# Altium PCB PCBdo_an2.PcbDoc
Units mil, origin at the board's own origin, x right, y up, seen from the top; angles counter-clockwise.
Board outline 3549.72 x 2579.72 mil, 2 copper layers (Top Layer, Bottom Layer); 32 components, 40 nets, 161 pads, 0 vias.
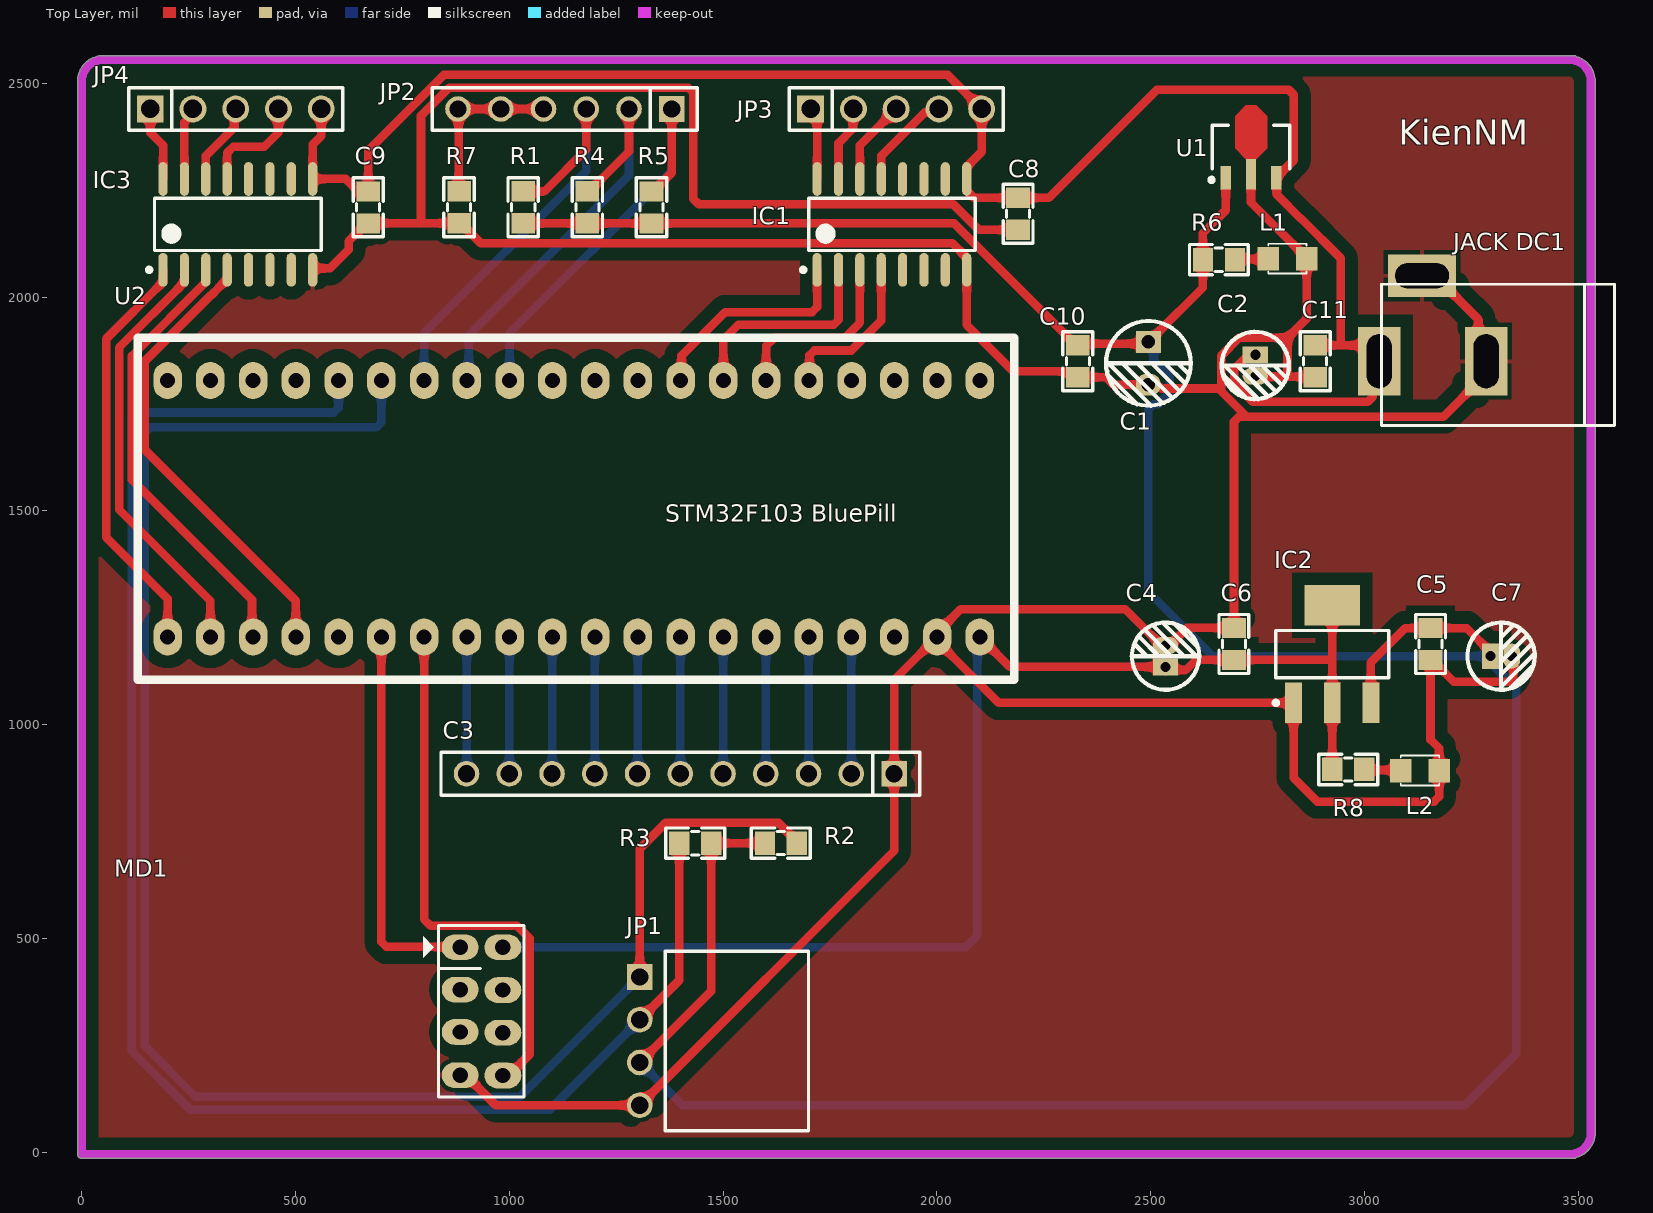
[diagram p0: Top Layer view]
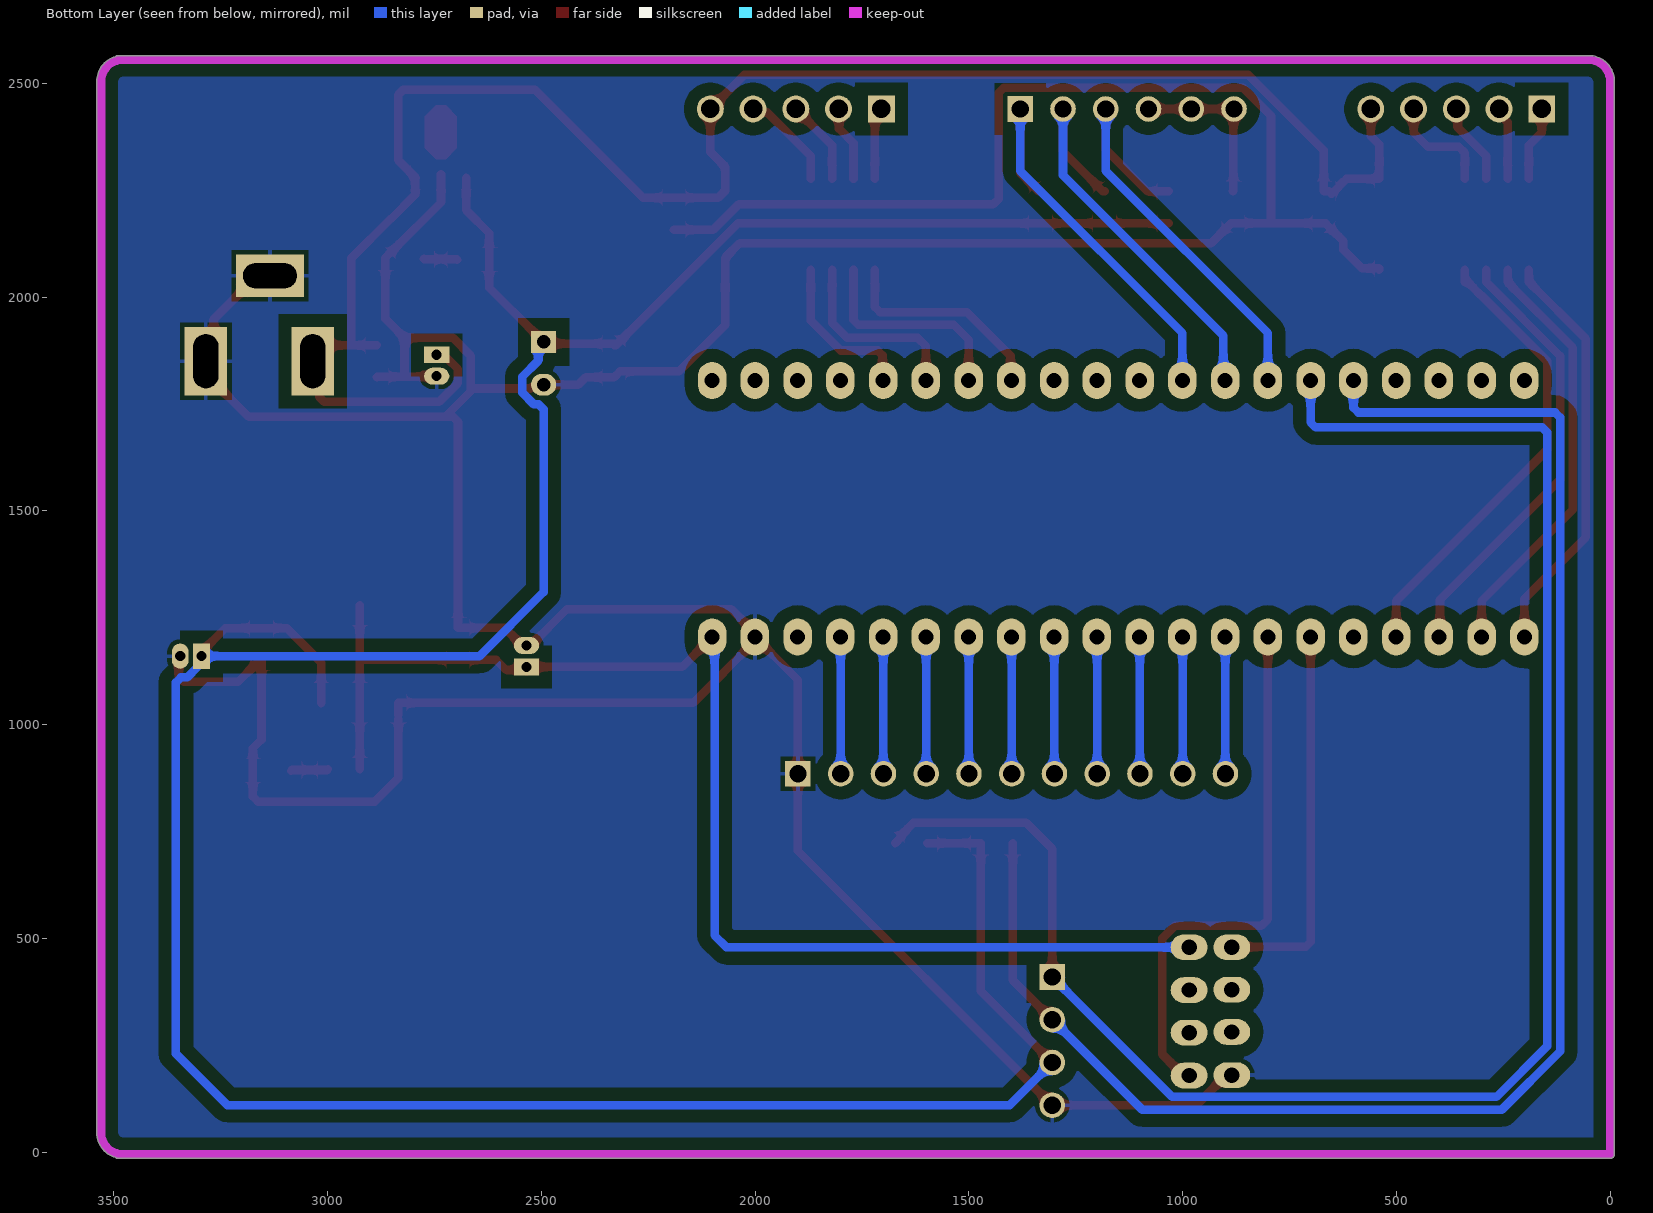
[diagram p1: Bottom Layer view, seen from below]
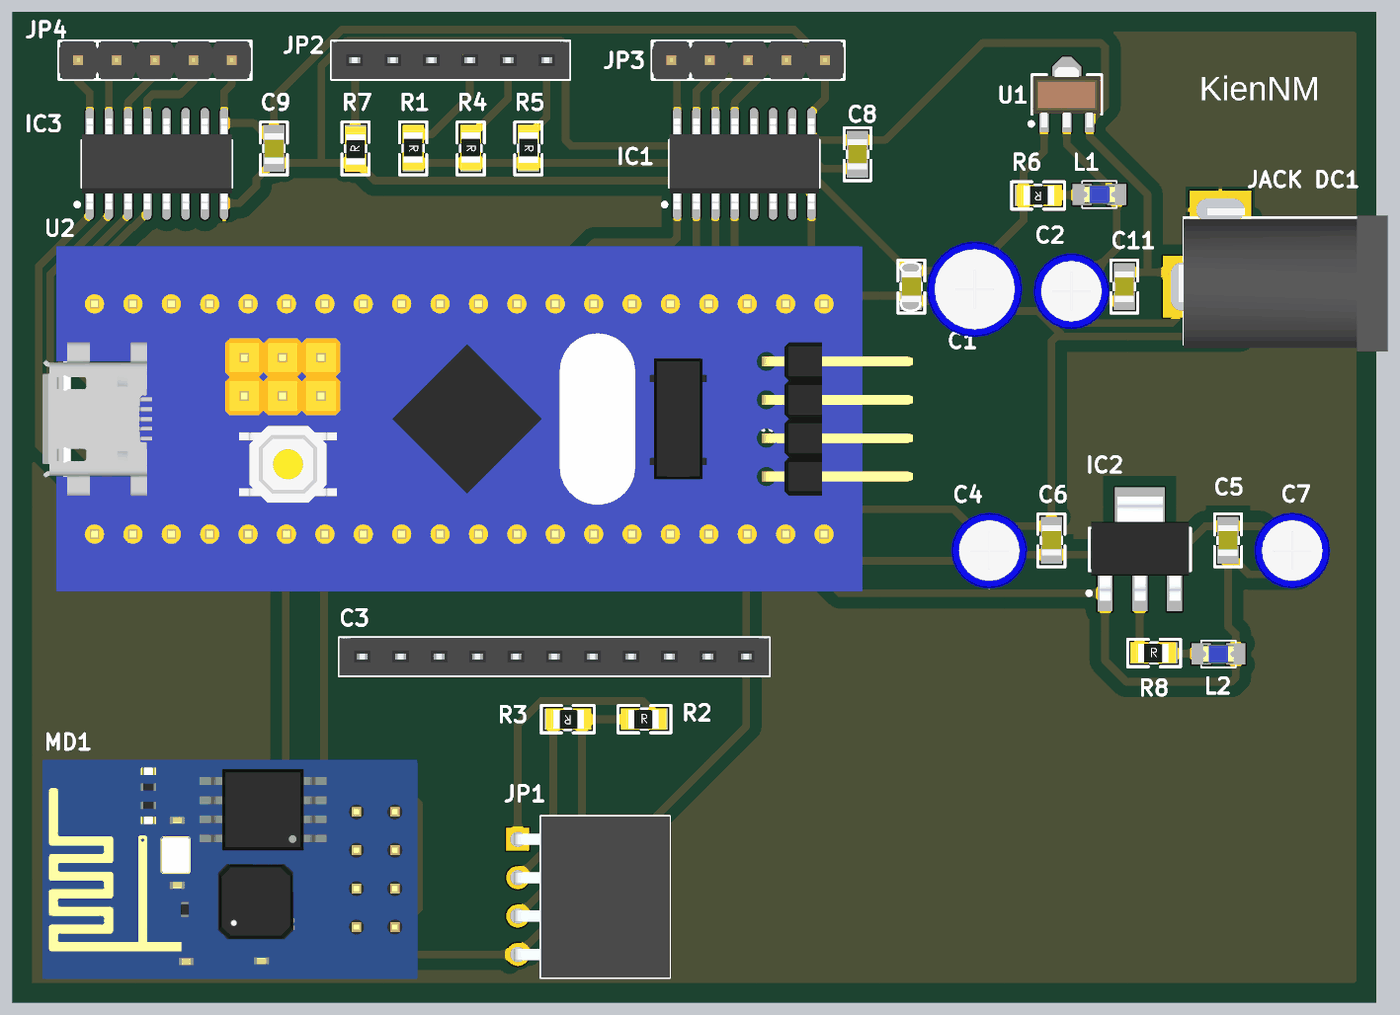
[diagram p2: 3D render of the assembled board from above, using the file's embedded part models]

## Layer stack, top to bottom
Top Solder: solder mask 0.4, Solder Resist, Dk 3.5
Top Layer: signal copper 1.4
Dielectric 1: dielectric 12.6, FR-4, Dk 4.8
Bottom Layer: signal copper 1.4
Bottom Solder: solder mask 0.4, Solder Resist, Dk 3.5

## Board outline
-9.86,-5 -9.86,2510 -9.27,2513.34 cw(c50,2505) 50,2564.86 50.08,2564.86 3480,2564.86 3490,2564.86 cw(c3490,2555) 3496.27,2562.6 cw(c3480,2505) 3539.27,2513.34 3539.86,2510 3539.86,2504.96 3539.86,45 cw(c3480,45) 3496.27,-12.6 cw(c3490,-5) 3490,-14.86 0,-14.86 cw(c0,-5)

## Design rules (kind name [scope] priority, off if disabled: settings)
Clearance [All] p1: gap=30 ignorepadtopadclearanceinfootprint=FALSE
PolygonConnect [All] p1: connectstyle=Relief reliefconductorwidth=10 reliefentries=4 polygonreliefangle="90 Angle" airgapwidth=10
RoutingVias [All] p1: holewidth=28 width=50 viastyle="Through Hole" minholewidth=28 minwidth=50 maxholewidth=28 maxwidth=50
SilkToSilkClearance [IsText] p1: silktosilkclearance=10
SolderMaskExpansion [All] p1: expansion=4 istentingtop=FALSE
Width [All] p1: maxlimit=40 minlimit=10 preferedwidth=25
29 further rules are at their usual default settings.

## Components (designator, comment, footprint, x,y, rotation, side; value= is the part's Value field where it differs from the comment)
C1 "1uF" "tu hoa 5mm" 2495,1845 r270 top
C2 "10uF" "tu hoa 4mm" 2745,1840 r270 top
C3 "JP11" JP11-C1T 1900,885 r180 top
C4 "10uF" "tu hoa 4mm" 2535,1160 r90 top
C5 "104" "tu 0805" 3155,1188.49 r270 top
C6 "104" "tu 0805" 2695,1188.49 r90 top
C7 "10uF" "tu hoa 4mm" 3320,1160 r0 top
C8 "33nF" "tu 0805" 2190,2195 r270 top
C9 "33nF" "tu 0805" 670,2210 r270 top
C10 "104" "tu 0805" 2330,1850 r270 top
C11 "104" "tu 0805" 2885,1850 r270 top
IC1 "ULN2003" "SOP 16" 1895,2170 r90 top
IC2 "LM1117" SOT223-4N 2925,1165 r90 top value=LM317
IC3 "ULN2003" "SOP 16" 365,2170 r90 top
"JACK DC1" "JACK DC 5.5" "JACK DC 5.5" 3160,1950 r180 top value="Jac DC"
JP1 "JP 1x4 2.54" "JP 1x4 CC" 1305,259.51 r270 top
JP2 "JP 1x6 2.54" "JP 1x6 CT" 1380,2440 r180 top
JP3 "JP 1x5 2.54" "JP 1x5 DT" 1705,2440 r0 top
JP4 "JP 1x5 2.54" "JP 1x5 DT" 160,2440 r0 top
L1 "LED 0805" LED-0805-Blue 2775,2090 r0 top
L2 "LED 0805" LED-0805-Blue 3085,892.46 r0 top
MD1 "ESP8266 Module" "ESP2866 Module" 885,479 r270 top
R1 "10k" "tro smd 0805" 1035,2210.1 r270 top
R2 "1k" "tro smd 0805" 1635,725 r0 top
R3 "1k" "tro smd 0805" 1435,720 r180 top
R4 "10k" "tro smd 0805" 1185,2210.1 r270 top
R5 "10k" "tro smd 0805" 1335,2210 r270 top
R6 "1k" "tro smd 0805" 2660,2085 r180 top
R7 "0R" "tro smd 0805" 880,2210.1 r90 top
R8 "180R" "tro smd 0805" 2962.23,897.39 r0 top
U1 "78L05 SMD SOT89" SOT89 2735,2350 r90 top
U2 "STM32 BluePill" "STM32 Bluepill" 1050.69,1525 r90 top

## Footprints (in the part's own frame and the unit in brackets; to place one, negate y for a bottom-side part, rotate by r counter-clockwise, add the part's x,y. Pads: shape width x height; smd on the part's side, far side on the other; paste and mask are expansions set on the pad)
"ESP2866 Module" [mil]
  oval 60x86 hole 36: 1(0,0) 2(99,0) 3(198,0) 4(299,0) 5(0,100) 6(100,100) 7(199.5,100) 8(300,100)
  silkscreen extent -51,-86 350,149, body extent -137,-817 433,159, height 381
"JACK DC 5.5" [mil] "Jac DC input"
  rect 100x160 hole 59.06 slot 125.98 at 90 deg: 1(125,100) 2(-125,100)
  rect 160x100 hole 59.06 slot 125.98 at 0 deg: 3(25,-100)
  silkscreen extent -425,-80 120,250, body extent -410,-105 134,269, height 434
JP11-C1T [mm] "11 row, straight, gold plating"
  rect 1.52x1.52 hole 1.02: 1(0,0)
  round 1.52 hole 1.02: 2(2.54,0) 3(5.08,0) 4(7.62,0) 5(10.16,0) 6(12.7,0) 7(15.24,0) 8(17.78,0) 9(20.32,0) 10(22.86,0) 11(25.4,0)
  silkscreen extent -1.52,-1.27 26.92,1.27, body extent -1.52,-1.27 26.92,1.23, height 8.51
"JP 1x4 CC" [mm]
  rect 1.52x1.52 hole 1.02: 1(-3.81,0)
  round 1.52 hole 1.02: 2(-1.27,0) 3(1.27,0) 4(3.81,0)
  silkscreen extent -5.33,1.52 5.33,10.03, body extent -5.33,-0.25 5.33,10.05, height 2.51
"JP 1x5 DT" [mm] "5 pins, 1 row, straight, gold plating"
  rect 1.6x1.6 hole 1.1: 1(0,0)
  round 1.6 hole 1.1: 2(2.54,0) 3(5.08,0) 4(7.62,0) 5(10.16,0)
  silkscreen extent -1.27,-1.27 11.43,1.27, body extent -1.27,-1.27 11.43,1.27, height 8.54
"JP 1x6 CT" [mm] "6 row, straight, gold plating"
  rect 1.52x1.52 hole 1.02: 1(0,0)
  round 1.52 hole 1.02: 2(2.54,0) 3(5.08,0) 4(7.62,0) 5(10.16,0) 6(12.7,0)
  silkscreen extent -1.52,-1.27 14.22,1.27, body extent -1.52,-1.25 14.22,1.25, height 8.51
LED-0805-Blue [mil]
  rect 50x55 smd: 1(0,0) 2(90,0)
  silkscreen extent 0,-35 90,35, body extent 5,-25 85,25, height 43
"SOP 16" [mm] "SOIC, 16-Leads, Body 9.90x3.91mm, Pitch 1.27mm, IPC Medium Density"
  oval 2x0.55 smd: 1(-2.7,4.445) 2(-2.7,3.175) 3(-2.7,1.905) 4(-2.7,0.635) 5(-2.7,-0.635) 6(-2.7,-1.905) 7(-2.7,-3.175) 8(-2.7,-4.445) 9(2.7,-4.445) 10(2.7,-3.175) 11(2.7,-1.905) 12(2.7,-0.635) 13(2.7,0.635) 14(2.7,1.905) 15(2.7,3.175) 16(2.7,4.445)
  silkscreen extent -2.82,-4.95 1.55,5.39, body extent -3,-4.95 3,4.95, height 1.4
SOT89 [mm] "SOT89, 3-Leads, Body 4.55x2.55mm, Pitch 1.50mm, Lead Span 4.1mm, IPC Medium Density"
  rect 1.4x0.6 smd: 1(-1.8,1.5) 3(-1.8,-1.5)
  rect 1.8x0.6 smd: 2(-1.6,0)
  Top Layer region: -0.7,0.3 -0.05,0.95 1.85,0.95 2.5,0.3 2.5,-0.3 1.85,-0.95 -0.05,-0.95 -0.7,-0.3
  silkscreen extent -2.05,-2.3 1.32,2.47, body extent -2.16,-2.25 1.84,2.25, height 1.5
SOT223-4N [mm] "SOT223, 4-Leads, Body 6.5x3.5mm, Pitch 2.3mm, Lead Span 7mm, IPC Medium Density"
  rect 2.4x1 smd: 1(-2.9,2.3) 2(-2.9,0) 3(-2.9,-2.3)
  rect 2.4x3.3 smd: 4(2.9,0)
  silkscreen extent -3.02,-3.35 1.4,3.47, body extent -3.39,-3.27 3.5,3.23, height 1.72
"STM32 Bluepill" [mm] "STM32 Bluepill"
  oval 2.2x1.7 hole 0.9: 1(-8.128,21.59) 2(-8.128,19.05) 3(-8.128,16.51) 4(-8.128,13.97) 5(-8.128,11.43) 6(-8.128,8.89) 7(-8.128,6.35) 8(-8.128,3.81) 9(-8.128,1.27) 10(-8.128,-1.27) 11(-8.128,-3.81) 12(-8.128,-6.35) 13(-8.128,-8.89) 14(-8.128,-11.43) 15(-8.128,-13.97) 16(-8.128,-16.51) 17(-8.128,-19.05) 18(-8.128,-21.59) 19(-8.128,-24.13) 20(-8.128,-26.67) 21(7.112,-26.67) 22(7.112,-24.13) 23(7.112,-21.59) 24(7.112,-19.05) 25(7.112,-16.51) 26(7.112,-13.97) 27(7.112,-11.43) 28(7.112,-8.89) 29(7.112,-6.35) 30(7.112,-3.81) 31(7.112,-1.27) 32(7.112,1.27) 33(7.112,3.81) 34(7.112,6.35) 35(7.112,8.89) 36(7.112,11.43) 37(7.112,13.97) 38(7.112,16.51) 39(7.112,19.05) 40(7.112,21.59)
  silkscreen extent -10.67,-28.7 9.65,23.37, body extent -11.94,-32.59 10.92,24.97, height 19.77
"tro smd 0805" [mm]
  rect 1.2x1.4 smd: 1(-0.946,-0.061) 2(0.954,-0.061)
  silkscreen extent -1.75,-0.97 1.75,0.84, body extent -1.56,-0.76 1.44,0.64, height 0.53
"tu 0805" [mm] "Compoment SMD 80x50mil"
  rect 1.2x1.4 smd: 1(-0.946,-0.003) 2(0.954,-0.003)
  silkscreen extent -1.75,-0.89 1.75,0.89, body extent -1.01,-0.64 1.01,0.63, height 0.61
"tu hoa 4mm" [mm]
  rect 1x1.5 hole 0.6: 1(-0.635,0)
  oval 1x1.5 hole 0.6: 2(0.635,0)
  silkscreen extent -2,-2 2.01,2.01, body extent -2.47,-2.47 2.58,2.58, height 14.81
"tu hoa 5mm" [mm]
  rect 1.3x1.5 hole 0.8: 1(-1.27,0)
  oval 1.3x1.5 hole 0.8: 2(1.27,0)
  silkscreen extent -2.51,-2.51 2.51,2.51, body extent -3.12,-3.18 3.23,3.18, height 14.55

## Part data
C1: library part "Tu Hoa 1uF 50V 5x11", "Cắm", Chung_Loai=Cắm, Don_Vi=Con, Ma_Hang=MH001355, So_Chan=2, Ten_Linh_Kien="Tụ Hóa 1uF 50V 5x11MM"
C2 C4 C7: library part "Tu Hoa 10uF 16V 4x7", "Cắm", Chung_Loai=Cắm, Don_Vi=Con, Ma_Hang=MH006855, So_Chan=2, Ten_Linh_Kien="Tụ Hóa 10uF 16V"
C3: "WR-PHD 2.54 mm Angled Socket Header", Manufacturer="W¨¹rth Elektronik eiSos GmbH", partNo=613011143121, ComponentLink1 Description=Manufacturer, ComponentLink1URL=http://www.we-online.com, ComponentLink2 Description=Datasheet, ComponentLink2URL=http://katalog.we-online.de/em/datasheet/6130xx143121.pdf, Created by="Karrer Zheng", Created Date="29 March 2013", NoPins=11
C5 C6 C10 C11: library part "Tu 0805 104 50V 10%", "Dán", Chung_Loai=Dán, Don_Vi=Con, Ma_Hang=MH004551, So_Chan=2, Ten_Linh_Kien="Tụ 0805 104-100nF 10% 50V"
C8 C9: library part "Tu 0805 33nF 50V 20%", "Dán", Chung_Loai=Dán, Don_Vi=Con, Ma_Hang=MH007854, So_Chan=2, Ten_Linh_Kien="Tụ 0805 33nF 50V 20%"
IC1 IC3: library part "ULN2003A SMD", "Dán", Chung_Loai=Dán, Don_Vi=Con, Ma_Hang=MH002408, Ten_Linh_Kien="ULN2003 SOP16"
IC2: "3v3"
JP1: library part "JP 1x4 2.54 Cai Cong", "Cắm", Chung_Loai=Cắm, Don_Vi=Con, Ma_Hang=MH001265, Ten_Linh_Kien="Jump Đơn Cái 2.54MM 1x40P Cong"
JP2: library part "JP 1x6 2.54 Cai Thang", "Cắm", Chung_Loai=Cắm, Don_Vi=Con, Ma_Hang=MH004006, Ten_Linh_Kien="Jump Đơn Cái 2.54MM 1x20P Thẳng"
JP3 JP4: library part "JP 1x5 2.54 Duc Thang", "Cắm", Chung_Loai=Cắm, Don_Vi=Con, Ma_Hang=MH000903, Ten_Linh_Kien="Jump Đơn Đực 2.54MM 1x40P Thẳng 11MM"
L1 L2: library part "LED 0805 Xanh Duong", "Dán", Chung_Loai=Dán, Don_Vi=Con, Ma_Hang=MH002327, Ten_Linh_Kien="LED 0805 Màu Xanh Dương (Blue)"
R1 R4 R5: library part "Tro 0805 5% 10k", "Dán", Chung_Loai=Dán, Don_Vi=Con, Ma_Hang=MH005239, So_Chan=2, Ten_Linh_Kien="Trở 0805 5% 10k"
R2 R3: library part "Tro 0805 1% 1k", "Dán", Chung_Loai=Dán, Don_Vi=Con, Ma_Hang=MH005468, So_Chan=2, Ten_Linh_Kien="Trở 0805 1% 1k"
R6: library part "Tro 0805 5% 1k", "Dán", Chung_Loai=Dán, Don_Vi=Con, Ma_Hang=MH005234, So_Chan=2, Ten_Linh_Kien="Trở 0805 5% 1k"
R7: library part "Tro 0805 5% 0R", "Dán", Chung_Loai=Dán, Don_Vi=Con, Ma_Hang=MH005230, So_Chan=2, Ten_Linh_Kien="Trở 0805 5% 0R"
R8: library part "Tro 0805 5% 180R", "Dán", Chung_Loai=Dán, Don_Vi=Con, Ma_Hang=MH005256, So_Chan=2, Ten_Linh_Kien="Trở 0805 5% 180R"
U1: "Dán", Chung_Loai=Dán, Don_Vi=Con, Ma_Hang=MH004845, Ten_Linh_Kien="78L05 SOT89 0.1A 5V"
U2: "STM32F103C8T6 breakout board"

## Nets (pads, with @x,y where several pads share a name; then routed paths per layer and width w, separated by ;. In a path a pad name is that pad's centre, name@x,y a point inside that pad or via, vN(x,y) a via of type N, cw(c..) or ccw(c..) an arc to the next point about the centre after c; other vN are vias at no path point)
3v3: C4.1 C6.1 IC2.2 IC2.4 MD1.5 R8.1 U2.20 | length 3080.9
  Top Layer w20: U2.20 2170.69,1135 C4.1 C4.1@2535,1125 ; C4.1@2535,1125.31 2537.5,1127.81 2582.81,1127.81 2606.26,1151.26 C6.1 2923.74,1151.26 2925,1150 ; R8.1 IC2.2 IC2.4
  Bottom Layer w20: MD1.5 2067.28,479 2095,506.72 2095,1199.31 U2.20
5v: C1.1 C5.1 C7.1 C10.1 IC2.3 JP1.3 R1.2 R2.1 R3.1 R4.2 R5.2 R6.2 U1.1 | length 7792.1
  Top Layer w20: R1.2@1032.61,2172.43 R5.2 2040.73,2172.43 2325.93,1887.23 C10.1 ; JP1.3 1472.23,376.74 R3.1 ; R3.1@1472.23,722.5 R2.1@1597.67,722.5 ; C10.1@2329.87,1891.11 2491.11,1891.11 C1.1 2498.94,1895 2514.53,1910.59 2514.53,1914.53 2622.43,2022.43 R6.2 2622.43,2149.69 2675.94,2203.21 U1.1 ; IC2.3 3015,1050.28 3015,1145 3095.72,1225.72 C5.1 3239.12,1225.72 3295,1169.84 C7.1
  Bottom Layer w20: JP1.3 1404.51,110 3235,110 3355,230 3355,1098.76 3343.28,1110.47 3328.56,1110.47 3304.69,1134.35 3304.69,1150.31 C7.1 2645,1160 2495,1310 2495,1737.69 2506.72,1749.41 2517.82,1749.41 2544.53,1776.12 2544.53,1813.88 2507.29,1851.13 2507.29,1882.71 C1.1
12v: "JACK DC1.1" C2.1 C8.1 C9.1 C11.1 IC1.9 IC3.9 JP3.5 JP4.5 U1.3 | length 4424
  Top Layer w20: JP4.5 560,2376.99 540,2356.99 IC3.9 616.86,2276.3 651.91,2241.24 657.9,2247.23 C9.1 669.87,2342.89 846.9,2519.92 2025.08,2519.92 JP3.5 2105,2339.84 2070,2304.84 IC1.9 2070,2248.2 2085.98,2232.23 C8.1 2262.23,2232.23 2515,2485 2823.28,2485 2835,2473.28 2835,2320.08 U1.3 2795,2278.19 2795,2240 2852.11,2182.89 2852.89,2182.89 2945,2090.78 2945,1890 2942.23,1887.23 ; C2.1 2735.31,1855.31 2719.35,1855.31 2695.47,1831.44 2695.47,1798.56 2739.03,1755 3008.28,1755 3020,1766.72 3020,1845 3030,1855 ; C11.1 2942.23,1887.23 ; 3035,1850 3030,1855 ; 2942.23,1887.23 2997.77,1887.23 3030,1855
  Bottom Layer w20: JP3.5@2105,2428.37 JP3.5
ADC1: JP2.3 R1.1 U2.34 | length 1092.8
  Top Layer w20: U2.34@785,1800 790,1805 U2.34 ; R1.1@1032.61,2247.23 1082.23,2247.23 1180,2345 JP2.3
  Bottom Layer w20: U2.34 800.69,1915.69 1180,2295 JP2.3
ADC2: JP2.2 R4.1 U2.33 | length 1027.5
  Top Layer w20: R4.1@1182.61,2247.23 1186.54,2247.23 1280,2340.68 JP2.2
  Bottom Layer w20: U2.33 905,1809.31 905,1910 1280,2285 JP2.2
ADC3: JP2.1 R5.1 U2.32 | length 1006.8
  Top Layer w20: R5.1 1336.54,2247.23 1380,2290.68 JP2.1
  Bottom Layer w20: U2.32 1000.69,1915.69 1380,2295 JP2.1
GND: "JACK DC1.2" "JACK DC1.3" C1.2 C2.2 C3.1 C4.2 C5.2 C6.2 C7.2 C8.2 C9.2 C10.2 C11.2 IC1.8 IC2.1 IC3.8 JP1.4 L1.2 L2.2 MD1.4 R7.1 U1.2 U2.19 | length 11524.2
  Top Layer w20: IC3.8 540,2066.56 540.76,2067.32 580.83,2067.32 624.02,2110.52 624.02,2130.52 665.93,2172.43 C9.2 670.09,2172.65 792.65,2172.65 ; MD1.4 898,180 968.49,109.51 JP1.4 1900,704.51 C3.1 1900,1104.31 U2.19 2000.69,1214.84 2055.84,1270 2440.16,1270 2525.16,1185 C4.2 2544.84,1185 2585.91,1226.07 C6.2 2695.13,1708.42 2706.85,1720.13 3185.13,1720.13 3285,1820 3285,1850 3296.72,1861.72 3266.72,1891.72 3266.72,1948.28 3165,2050 3135,2050 ; U2.19@2000.69,1195.16 2145.02,1050.83 IC2.1 IC2.1@2834.45,1023.27 ; C8.2 2098.16,2157.43 2038.65,2216.93 1443.07,2216.93 1429.92,2230.08 1429.92,2478.21 1418.21,2489.92 859.32,2489.92 793.37,2423.97 793.37,2173.37 792.65,2172.65 ; 2665.47,1786.14 2665.47,1862.97 2707.19,1904.69 2820.29,1904.69 ; 2720,1725 2658.86,1786.14 2526.24,1786.14 2523.35,1789.03 2500.97,1789.03 C1.2 2413.94,1795 2396.52,1812.43 C10.2 2316.24,1826.05 2178.95,1826.05 2070,1935 IC1.8 2070,2092.24 2036.34,2125.91 933.3,2125.91 886.33,2172.87 R7.1 882.17,2172.65 792.65,2172.65 ; U1.2 2735,2221.57 2849.07,2107.5 2850,2107.5 2865,2092.5 L1.2 2865,1949.4 2820.29,1904.69 ; C2.2 2754.84,1815 2756.13,1813.71 2819.85,1813.71 ; C2.2@2748.71,1818.71 2776.2,1818.71 ; IC2.1@2834.45,1013.58 2834.45,875.55 2890,820 3163.28,820 3175,831.72 L2.2 3175,945 3154.87,965.13 C5.2 3158.8,1150.92 3209.8,1099.92 3336.99,1099.92 3348.71,1111.63 3348.71,1156.29 C7.2 ; C11.2 2883.58,1813.71 2819.85,1813.71 ; 2819.85,1813.71 2820.29,1814.14 2820.29,1904.69
  Bottom Layer w20: U2.19@2000,1204.31 U2.19 U2.19@2000.69,1195.16
NetC3_2: C3.2 U2.17 | length 320.3
  Bottom Layer w20: C3.2 1800.34,885.34 1800.34,1204.66 U2.17
NetC3_3: C3.3 U2.16 | length 320.3
  Bottom Layer w20: C3.3 1700.34,885.34 1700.34,1204.66 U2.16
NetC3_4: C3.4 U2.15 | length 320.3
  Bottom Layer w20: C3.4 1600.34,885.34 1600.34,1204.66 U2.15
NetC3_5: C3.5 U2.14 | length 320.3
  Bottom Layer w20: C3.5 1500.34,885.34 1500.34,1204.66 U2.14
NetC3_6: C3.6 U2.13 | length 320.3
  Bottom Layer w20: C3.6 1400.34,885.34 1400.34,1204.66 U2.13
NetC3_7: C3.7 U2.12 | length 320.3
  Bottom Layer w20: C3.7 1300.34,885.34 1300.34,1204.66 U2.12
NetC3_8: C3.8 U2.11 | length 320.3
  Bottom Layer w20: C3.8 1200.34,885.34 1200.34,1204.66 U2.11
NetC3_9: C3.9 U2.10 | length 320.3
  Bottom Layer w20: C3.9 1100.34,885.34 1100.34,1204.66 U2.10
NetC3_10: C3.10 U2.9 | length 320.3
  Bottom Layer w20: C3.10 1000.34,885.34 1000.34,1190.34 1000.69,1190.69 U2.9
NetC3_11: C3.11 U2.8 | length 320.3
  Bottom Layer w20: C3.11 900.34,885.34 900.34,1204.66 U2.8
NetIC1_13: IC1.13 JP3.4 | length 234.3
  Top Layer w20: IC1.13 1870,2330 1971.77,2431.77 1996.77,2431.77 JP3.4
NetIC1_14: IC1.14 JP3.3 | length 198.9
  Top Layer w20: IC1.14 1820,2355 JP3.3
NetIC1_15: IC1.15 JP3.2 | length 178.2
  Top Layer w20: IC1.15 1770,2360 1804.02,2394.02 1804.02,2439.02 JP3.2
NetIC1_16: IC1.16 JP3.1 | length 169.9
  Top Layer w20: JP3.1 1720,2425 IC1.16
NetIC3_13: IC3.13 JP4.4 | length 255.9
  Top Layer w20: IC3.13 340,2337.57 353.73,2351.31 426.31,2351.31 460,2385 JP4.4
NetIC3_14: IC3.14 JP4.3 | length 192.7
  Top Layer w20: IC3.14 290,2330 356.52,2396.52 356.52,2436.52 JP4.3
NetIC3_15: IC3.15 JP4.2 | length 172
  Top Layer w20: IC3.15 240,2408.37 260,2428.37 JP4.2
NetIC3_16: IC3.16 JP4.1 | length 206.5
  Top Layer w20: JP4.1@181.5,2418.5 JP4.1 160,2385 190,2355 IC3.16
NetJP2_4: JP2.4 JP2.5 JP2.6 R7.2 | length 393.4
  Top Layer w20: R7.2@882.39,2247.57 881.2,2248.77 881.2,2438.8 JP2.6 JP2.5 JP2.4
NetL1_1: L1.1 R6.1 | length 78.9
  Top Layer w20: R6.1 2698.53,2088.7 2773.7,2088.7 L1.1
NetL2_1: L2.1 R8.2 | length 86.3
  Top Layer w20: R8.2 3001.07,893.73 3083.73,893.73 L2.1
PA0: IC1.4 U2.25 | length 379.4
  Top Layer w20: U2.25 1702,1806.31 1702,1863.28 1713.71,1875 1800,1875 1870,1945 IC1.4
PA1: IC1.3 U2.26 | length 446.2
  Top Layer w20: U2.26 1600.69,1885.69 1620,1905 1785,1905 1820,1940 IC1.3
PA2: IC1.2 U2.27 | length 501.1
  Top Layer w20: U2.27 1500.69,1900.69 1535,1935 1758.28,1935 1770,1946.72 IC1.2
PA3: IC1.1 U2.28 | length 510
  Top Layer w20: U2.28 1402.64,1806.95 1402.64,1862.64 1505,1965 1708.28,1965 1720,1976.72 IC1.1
PB12: IC3.1 U2.1 | length 973.1
  Top Layer w20: IC3.1 190,2035.16 57.22,1902.38 57.22,1437.78 200.69,1294.31 U2.1
PB13: IC3.2 U2.2 | length 1010.4
  Top Layer w20: IC3.2 240,2034.71 87.22,1881.93 87.22,1502.78 300.69,1289.31 U2.2
PB14: IC3.3 U2.3 | length 1047.7
  Top Layer w20: IC3.3 289.46,2063.16 289.46,2034.62 117.22,1862.38 117.22,1572.78 398.05,1291.95 398.05,1207.64 U2.3
PB15: IC3.4 U2.4 | length 1089.3
  Top Layer w20: IC3.4 340,2035.61 339.24,2034.84 333.05,2034.84 320.83,2022.61 320.83,2022.39 302.77,2004.33 301.6,2004.33 147.22,1849.95 147.22,1642.78 500.55,1289.45 500.55,1205.14 U2.4
RX: MD1.8 U2.7 | length 1280.9
  Top Layer w20: U2.7 800.69,544.31 816,529 1018.71,529 1048,499.71 1048,229 998,179 MD1.8
SCL: JP1.1 R2.2 U2.35 | length 4135.2
  Top Layer w20: JP1.1 1305,709.43 1365.73,770.17 1629.68,770.17 1658.95,740.89 1658.95,736.23 R2.2
  Bottom Layer w20: U2.35 700.69,1706.72 688.97,1695 158.94,1695 147.22,1683.28 147.22,247.78 266,129 1024.49,129 JP1.1
SDA: JP1.2 R3.2 U2.36 | length 3822
  Top Layer w20: JP1.2 1397.43,401.93 R3.2
  Bottom Layer w20: U2.36 600.69,1741.72 588.97,1730 128.94,1730 117.22,1718.28 117.22,235.35 253.57,99 1094.49,99 JP1.2
TX: MD1.1 U2.6 | length 902.9
  Top Layer w20: U2.6 700.69,491.72 712.4,480 884,480 MD1.1
pads on no net: IC1.5 IC1.6 IC1.7 IC1.10 IC1.11 IC1.12 IC3.5 IC3.6 IC3.7 IC3.10 IC3.11 IC3.12 MD1.2 MD1.3 MD1.6 MD1.7 U2.5 U2.18 U2.21 U2.22 U2.23 U2.24 U2.29 U2.30 U2.31 U2.37 U2.38 U2.39 U2.40

## Polygon pours and split planes (outlines as drawn)
GND on Top Layer "top poly" (solid, remove dead copper, pour order 1): 0,2555 0,-5 5,-10 3535,-10 3535,2545 3525,2555
GND on Bottom Layer "buttom" (solid, remove dead copper, pour order 5): -10,2575 -5,2570 -5,0 3530,0 3540,10 3525,25 3525,2565

## Keep-outs
Keep-Out Layer:
  lines w19.68: 0,2505 cw(c50,2505) 50,2555 3490,2555 ; 0,2510 0,-5 ; 3480,-5 ccw(c3480,45) 3530,45 3530,2510 ; 3480,2555 cw(c3480,2505) 3530,2505 ; 3490,-5 0,-5 ; 0,-5 0,-5

## Silkscreen, mask and mechanical layers (free items; w line width, h text height)
Top Overlay:
  text "KienNM" at 3080,2336.02 h100

## Text inside footprints (layer, text, board x,y; h text height)
U2: Top Overlay "STM32F103 BluePill" at 1365,1475 h40